# Altium PCB RT1052_MB.PcbDoc
Units mm, origin at the board's own origin, x right, y up, seen from the top; angles counter-clockwise.
Board outline 75.18 x 70.36 mm, 2 copper layers (Top, Bottom), stack 0.323 mm thick; 2 components, 142 nets, 164 pads, 0 vias.
Unrouted connection lines stored in the file: 18.
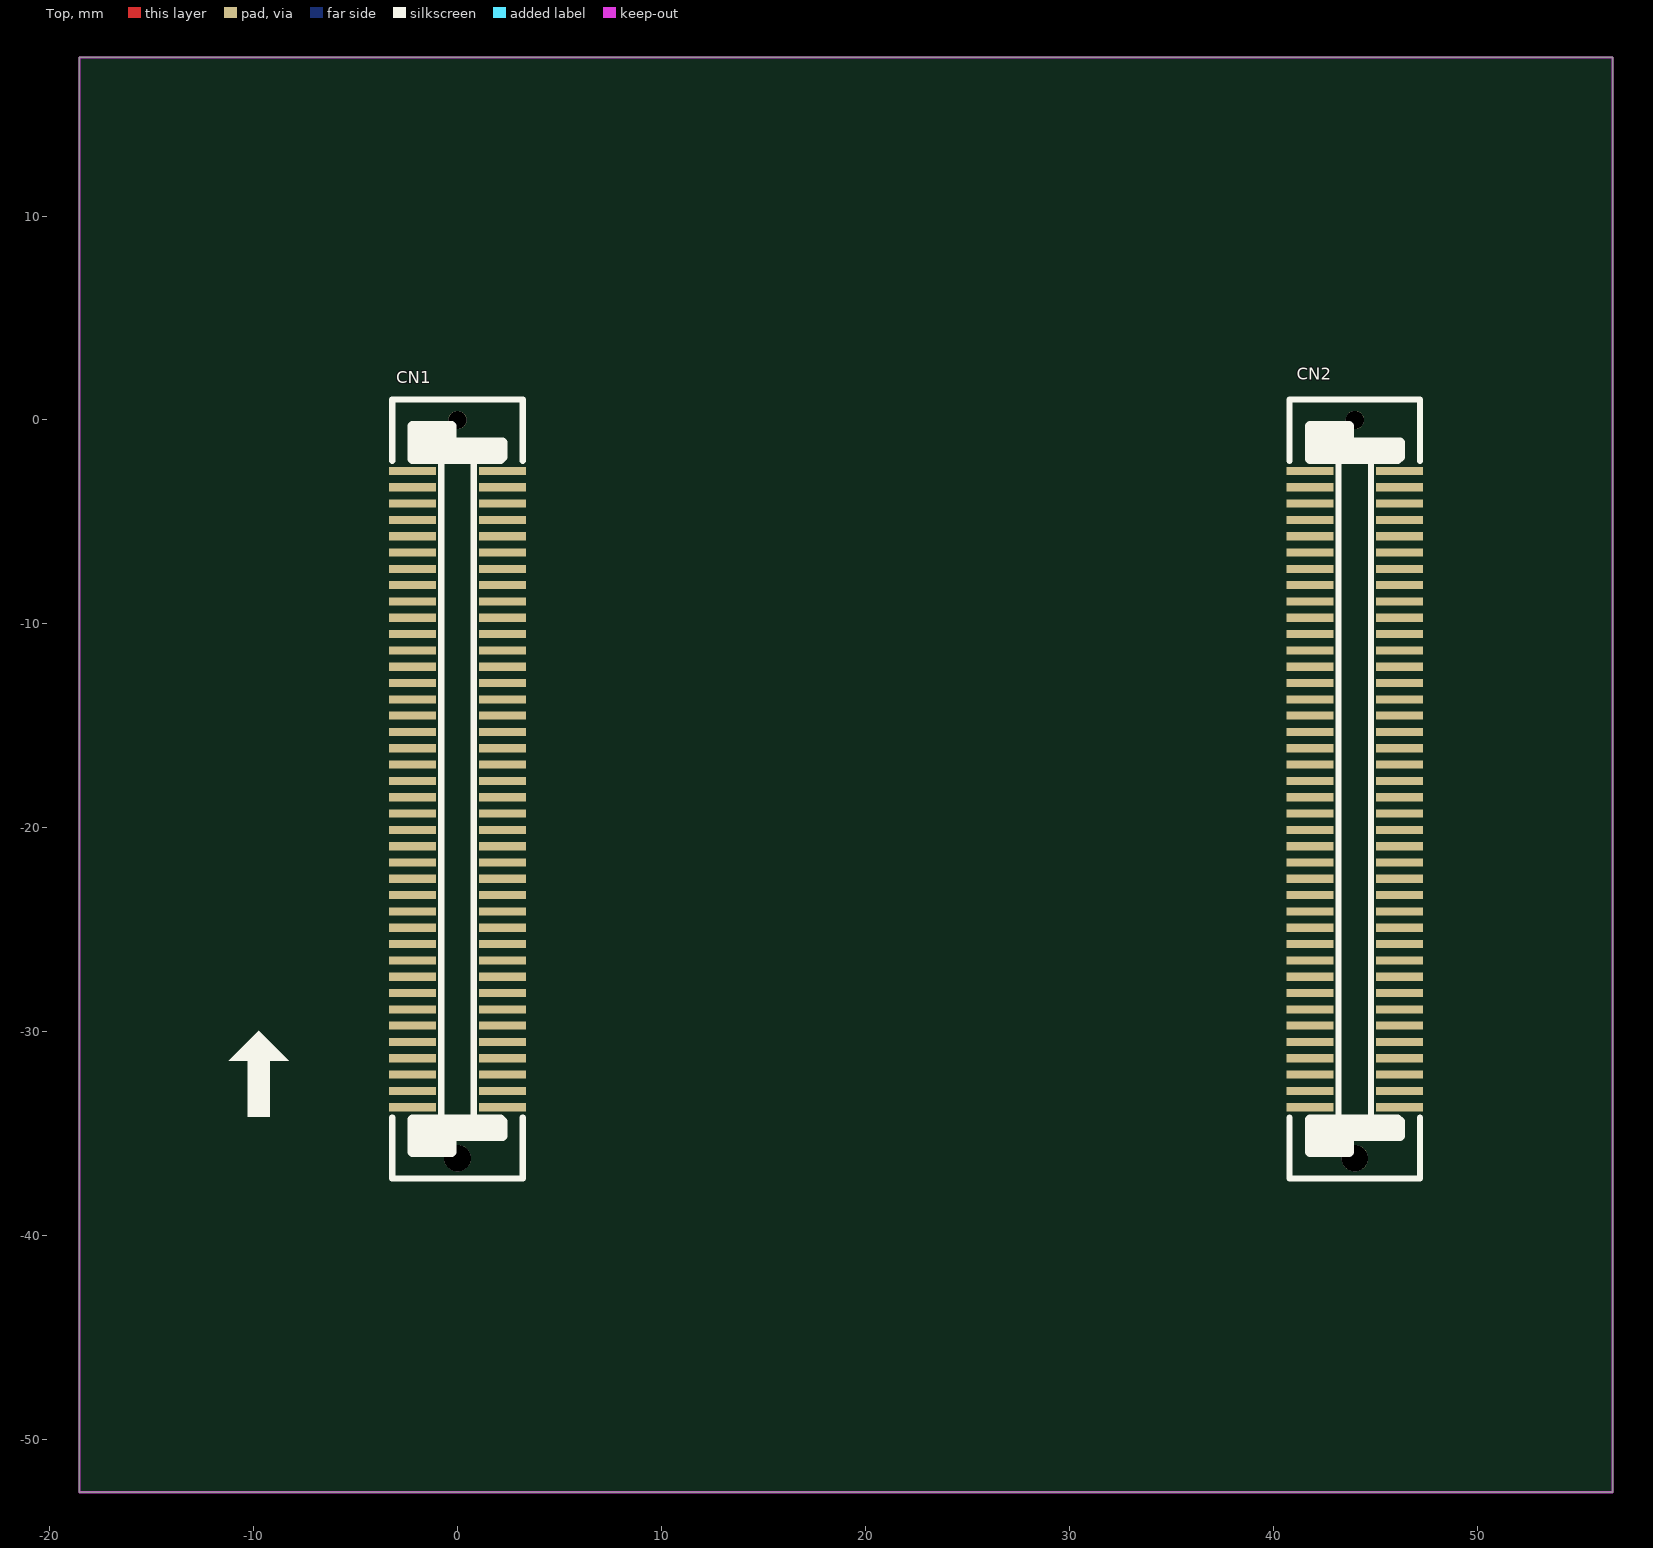
[diagram p0: Top view]
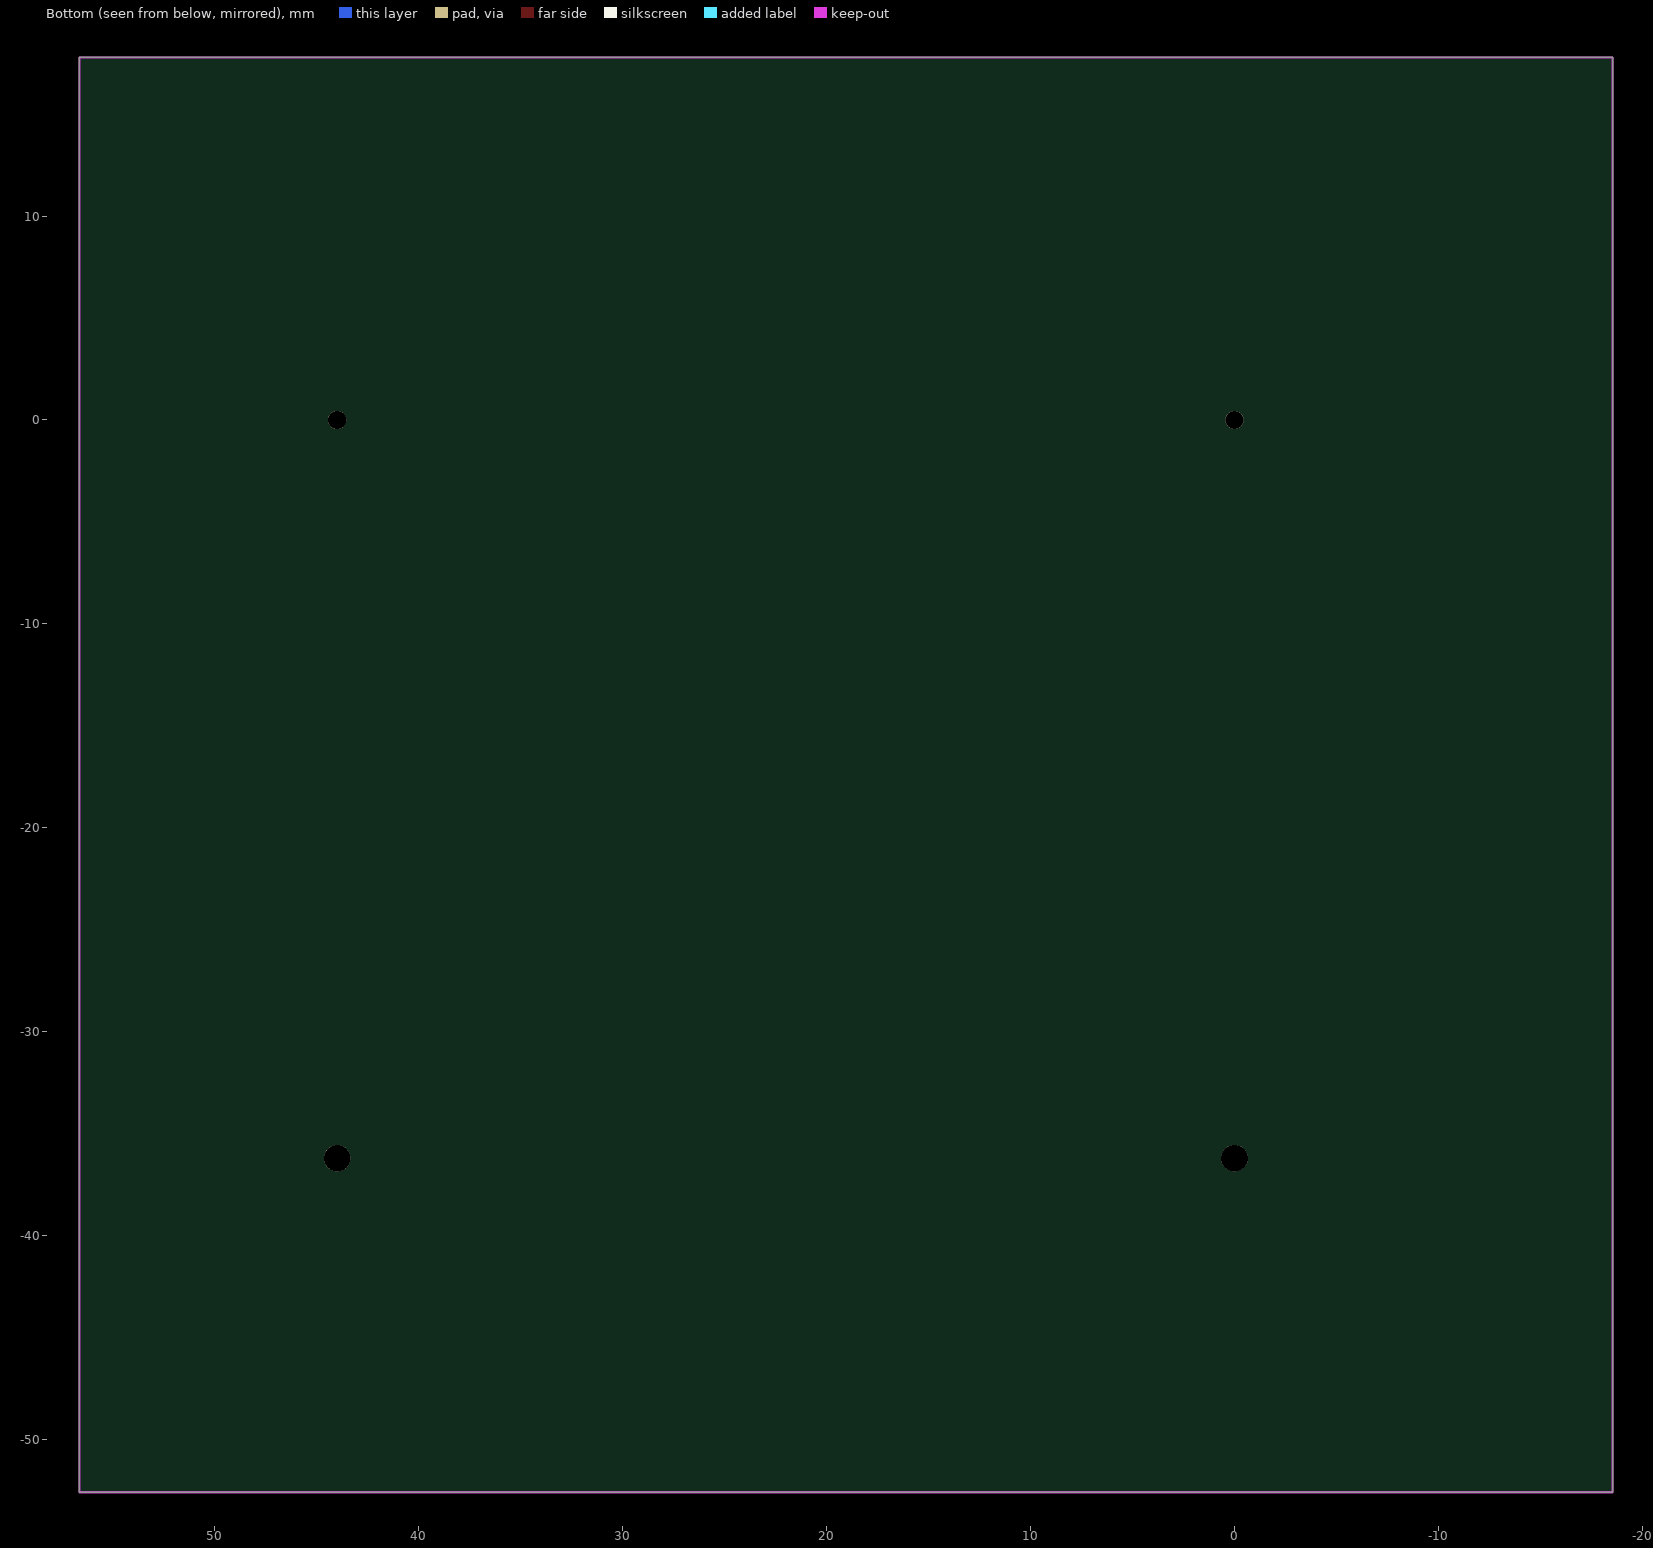
[diagram p1: Bottom view, seen from below]

## Layer stack, top to bottom
Solder Mask Top: solder mask 0.0102, Solder Resist, Dk 3.5
Top: signal copper 0.0343
Dielectric 1: dielectric 0.254, FR-4, Dk 4.3
Bottom: signal copper 0.0343
Solder Mask Bottom: solder mask 0.0102, Solder Resist, Dk 3.5

## Board outline
-18.542,17.78 56.642,17.78 56.642,-52.578 -18.542,-52.578

## Design rules (kind name [scope] priority, off if disabled: settings)
Clearance "Clearance - Default - DEFAULT- SMD" [IsVia vs IsSMTPin] p1: gap=0.152
Clearance "Clearance - Default - DEFAULT - Via" [IsVia vs IsVia] p2: gap=0.152
Clearance "Clearance - Default - DEFAULT - Net" [All] p3: gap=0.127 except(0.254: Fill-Fill Fill-Poly Fill-Region Poly-Poly Poly-Region Region-Region Text-Text)
ComponentClearance "ComponentClearance - Default - DEFAULT" [All] p1: gap=0.152 collisioncheckmode=3 verticalgap=0.254 showdistances=FALSE
HoleToHoleClearance "HoleToHoleClearance - Default - DEFAULT" [All] p1: gap=0.152 allowstackedmicrovias=TRUE
Length "Default Length" [All] p1: maxlimit=1270 minlimit=0
MaxMinImpedance "Default Impedance" [All] p1: minimum=50.00 maximum=150.0
ParallelSegment "Default Parallel Segment Same Layer" [All] p1: limit=25.4 gap=5.08
ParallelSegment "Default Parallel Segment Adjasent" [All] p2: limit=25.4 gap=5.08
PlaneConnect "Default PlaneConnect" [All] p1: planeconnectstyle=Relief reliefexpansion=0.508 reliefentries=0 reliefconductorwidth=0.381 reliefairgap=0.254
PolygonConnect "PolygonConnect - Default SMT" [IsSMTPin] p1: connectstyle=Relief reliefconductorwidth=0.254 reliefentries=4 polygonreliefangle="45 Angle" airgapwidth=0.254
PolygonConnect "PolygonConnect - Default Pad" [All] p2: connectstyle=Relief reliefconductorwidth=0.381 reliefentries=4 polygonreliefangle="45 Angle" airgapwidth=0.254
RoutingLayers "RoutingLayers - Default - DEFAULT" [All] p1: top layer_v5=TRUE bottom layer_v5=TRUE
RoutingPriority "RoutingPriority - Default - DEFAULT" [All] p1: routingpriority=3
RoutingTopology "Default Routing Topology" [All] p1: topology=Shortest
RoutingVias "RoutingVias - Default - DEFAULT" [All] p1: holewidth=0.305 width=0.457 viastyle="Through Hole" minholewidth=0.305 minwidth=0.457 maxholewidth=0.305 maxwidth=0.457
SMDToCorner "SMDToCorner - Default - DEFAULT" [All] p1: distance=60000
SolderMaskExpansion "SolderMaskExpansion from CAM settings" [All] p1: expansion=0.127
Width "Default Width" [All] p1: maxlimit=2.54 minlimit=0.127 preferedwidth=0.127
24 further rules are at their usual default settings.

## Components (designator, comment, footprint, x,y, rotation, side; value= is the part's Value field where it differs from the comment)
CN1 "B2B_2X40_0_8MM" B2BF-2X40-0P8 0,0 r0 top
CN2 "B2B_2X40_0_8MM" B2BF-2X40-0P8 43.999,0 r0 top

## Footprints (in the part's own frame and the unit in brackets; to place one, negate y for a bottom-side part, rotate by r counter-clockwise, add the part's x,y. Pads: shape width x height; smd on the part's side, far side on the other; paste and mask are expansions set on the pad)
B2BF-2X40-0P8 [mm]
  rect 2.3x0.4 smd: 1(2.2,-2.5) 2(-2.2,-2.5) 3(2.2,-3.3) 4(-2.2,-3.3) 5(2.2,-4.1) 6(-2.2,-4.1) 7(2.2,-4.9) 8(-2.2,-4.9) 9(2.2,-5.7) 10(-2.2,-5.7) 11(2.2,-6.5) 12(-2.2,-6.5) 13(2.2,-7.3) 14(-2.2,-7.3) 15(2.2,-8.1) 16(-2.2,-8.1) 17(2.2,-8.9) 18(-2.2,-8.9) 19(2.2,-9.7) 20(-2.2,-9.7) 21(2.2,-10.5) 22(-2.2,-10.5) 23(2.2,-11.3) 24(-2.2,-11.3) 25(2.2,-12.1) 26(-2.2,-12.1) 27(2.2,-12.9) 28(-2.2,-12.9) 29(2.2,-13.7) 30(-2.2,-13.7) 31(2.2,-14.5) 32(-2.2,-14.5) 33(2.2,-15.3) 34(-2.2,-15.3) 35(2.2,-16.1) 36(-2.2,-16.1) 37(2.2,-16.9) 38(-2.2,-16.9) 39(2.2,-17.7) 40(-2.2,-17.7) 41(2.2,-18.5) 42(-2.2,-18.5) 43(2.2,-19.3) 44(-2.2,-19.3) 45(2.2,-20.1) 46(-2.2,-20.1) 47(2.2,-20.9) 48(-2.2,-20.9) 49(2.2,-21.7) 50(-2.2,-21.7) 51(2.2,-22.5) 52(-2.2,-22.5) 53(2.2,-23.3) 54(-2.2,-23.3) 55(2.2,-24.1) 56(-2.2,-24.1) 57(2.2,-24.9) 58(-2.2,-24.9) 59(2.2,-25.7) 60(-2.2,-25.7) 61(2.2,-26.5) 62(-2.2,-26.5) 63(2.2,-27.3) 64(-2.2,-27.3) 65(2.2,-28.1) 66(-2.2,-28.1) 67(2.2,-28.9) 68(-2.2,-28.9) 69(2.2,-29.7) 70(-2.2,-29.7) 71(2.2,-30.5) 72(-2.2,-30.5) 73(2.2,-31.3) 74(-2.2,-31.3) 75(2.2,-32.1) 76(-2.2,-32.1) 77(2.2,-32.9) 78(-2.2,-32.9) 79(2.2,-33.7) 80(-2.2,-33.7)
  round 1.3 hole 1.3: 81(0,-36.2)
  round 0.9 hole 0.9: 82(0,0)
  silkscreen extent -3.2,-37.2 3.2,1

## Nets (pads, with @x,y where several pads share a name; then routed paths per layer and width w, separated by ;. In a path a pad name is that pad's centre, name@x,y a point inside that pad or via, vN(x,y) a via of type N, cw(c..) or ccw(c..) an arc to the next point about the centre after c; other vN are vias at no path point)
5V: CN2.75 CN2.76 CN2.77 CN2.78 CN2.79 CN2.80
CAN2_RX: CN2.19
CAN2_TX: CN2.17
CLK1_OUT_N: CN2.37
CLK1_OUT_P: CN2.39
ENET_CRS_DV: CN1.15
ENET_MDC: CN1.16
ENET_MDIO: CN1.18
ENET_RXD0: CN1.10
ENET_RXD1: CN1.12
ENET_RXER: CN1.14
ENET_TX_CLK: CN1.17
ENET_TXD0: CN1.11
ENET_TXD1: CN1.13
ENET_TXEN: CN1.9
ETH_LINK: CN1.6
ETH_RXN: CN1.1
ETH_RXP: CN1.3
ETH_SPD: CN1.5
ETH_TXN: CN1.2
ETH_TXP: CN1.4
FLEXSPI_CLK: CN2.53
FLEXSPI_CLK_B: CN2.54
FLEXSPI_D0_A: CN2.55
FLEXSPI_D0_B: CN2.56
FLEXSPI_D1_A: CN2.57
FLEXSPI_D1_B: CN2.58
FLEXSPI_D2_A: CN2.59
FLEXSPI_D2_B: CN2.60
FLEXSPI_D3_A: CN2.61
FLEXSPI_D3_B: CN2.62
FLEXSPI_DQS: CN2.52
FLEXSPI_SS0: CN2.51
GND: CN1.7 CN1.8 CN1.39 CN1.40 CN1.79 CN2.6 CN2.7 CN2.12 CN2.22 CN2.46 CN2.64 CN2.71 CN2.72 CN2.73
GPIO_AD_B0_02: CN2.14
GPIO_AD_B0_03: CN2.16
GPIO_AD_B0_04: CN2.18
GPIO_AD_B0_05: CN2.20
GPIO_AD_B1_05: CN2.24
GPIO_AD_B1_06: CN2.26
GPIO_AD_B1_07: CN2.28
GPIO_AD_B1_08: CN2.30
I2C1_SCL: CN2.21
I2C1_SDA: CN2.23
JTAG_NTRST: CN2.5
JTAG_TCK: CN2.2
JTAG_TDI: CN2.1
JTAG_TDO: CN2.4
JTAG_TMS: CN2.3
KEY: CN2.48
LCDIF_CLK: CN1.37
LCDIF_D0: CN1.19
LCDIF_D1: CN1.20
LCDIF_D2: CN1.21
LCDIF_D3: CN1.22
LCDIF_D4: CN1.23
LCDIF_D5: CN1.24
LCDIF_D6: CN1.25
LCDIF_D7: CN1.26
LCDIF_D8: CN1.27
LCDIF_D9: CN1.28
LCDIF_D10: CN1.29
LCDIF_D11: CN1.30
LCDIF_D12: CN1.31
LCDIF_D13: CN1.32
LCDIF_D14: CN1.33
LCDIF_D15: CN1.34
LCDIF_ENA: CN1.38
LCDIF_HS: CN1.36
LCDIF_VS: CN1.35
ONOFF: CN2.50
OTG1_DN: CN2.40
OTG1_DP: CN2.38
OTG2_DN: CN2.42
OTG2_DP: CN2.44
PMIC_ON: CN2.49
PMIC_STBY: CN2.45
POR_B: CN2.47
SAI1_MCLK: CN2.35
SAI1_RX_BCLK: CN2.29
SAI1_RX_SYNC: CN2.31
SAI1_RXD: CN2.33
SAI1_TX_BCLK: CN2.34
SAI1_TX_SYNC: CN2.32
SAI1_TXD: CN2.36
SD0_VSELECT: CN2.63
SD1_CLK: CN2.70
SD1_CMD: CN2.68
SD1_D0: CN2.65
SD1_D1: CN2.67
SD1_D2: CN2.69
SD1_D3: CN2.66
SEMC_A0: CN1.41
SEMC_A1: CN1.42
SEMC_A2: CN1.43
SEMC_A3: CN1.44
SEMC_A4: CN1.45
SEMC_A5: CN1.46
SEMC_A6: CN1.47
SEMC_A7: CN1.48
SEMC_A8: CN1.49
SEMC_A9: CN1.50
SEMC_A10: CN1.51
SEMC_A11: CN1.52
SEMC_A12: CN1.53
SEMC_BA0: CN1.58
SEMC_BA1: CN1.59
SEMC_CAS: CN1.56
SEMC_CKE: CN1.60
SEMC_CLK: CN1.80
SEMC_CS0: CN1.54
SEMC_CSX0: CN2.27
SEMC_D0: CN1.63
SEMC_D1: CN1.64
SEMC_D2: CN1.65
SEMC_D3: CN1.66
SEMC_D4: CN1.67
SEMC_D5: CN1.68
SEMC_D6: CN1.69
SEMC_D7: CN1.70
SEMC_D8: CN1.71
SEMC_D9: CN1.72
SEMC_D10: CN1.73
SEMC_D11: CN1.74
SEMC_D12: CN1.75
SEMC_D13: CN1.76
SEMC_D14: CN1.77
SEMC_D15: CN1.78
SEMC_DM0: CN1.61
SEMC_DM1: CN1.62
SEMC_RAS: CN1.57
SEMC_RDY: CN2.25
SEMC_WE: CN1.55
SPDIF_IN: CN2.8
SPDIF_OUT: CN2.10
UART1_RXD: CN2.11
UART1_TXD: CN2.9
UART5_RXD: CN2.15
UART5_TXD: CN2.13
USB_OTG1_ID: CN2.41
USB_OTG2_ID: CN2.43
VDD_COIN_3V: CN2.74
pads on no net: CN1.81 CN1.82 CN2.81 CN2.82

## Keep-outs
Keep-Out Layer:
  the board outline again, w0.102

## Silkscreen, mask and mechanical layers (free items; w line width, h text height)
Silkscreen Top:
  region: -9.215,-34.164 -10.285,-34.164 -10.285,-31.419 -11.209,-31.419 -9.746,-29.956 -8.282,-31.419 -9.215,-31.419 -9.215,-34.164
Assembly Drawing Top:
  circle w0.254: c-2.47,6.46 r2.54
  circle w0.254: c46.47,6.46 r2.54
  circle w0.254: c46.47,-42.46 r2.54
  circle w0.254: c-2.47,-42.46 r2.54
  lines w0.254: -5.01,-45 49.01,-45 49.01,9 -5.01,9 -5.01,-45
Layer_7:
  lines w0.254: -4.996,-44.987 49.004,-44.987 49.004,9.013 -4.996,9.013 -4.996,-44.987